# Altium PCB SOIC28.PcbDoc
Units mil, origin at the board's own origin, x right, y up, seen from the top; angles counter-clockwise.
Board outline 800 x 1400 mil, 2 copper layers (Top Layer, Bottom Layer); 3 components, 28 nets, 56 pads, 0 vias.
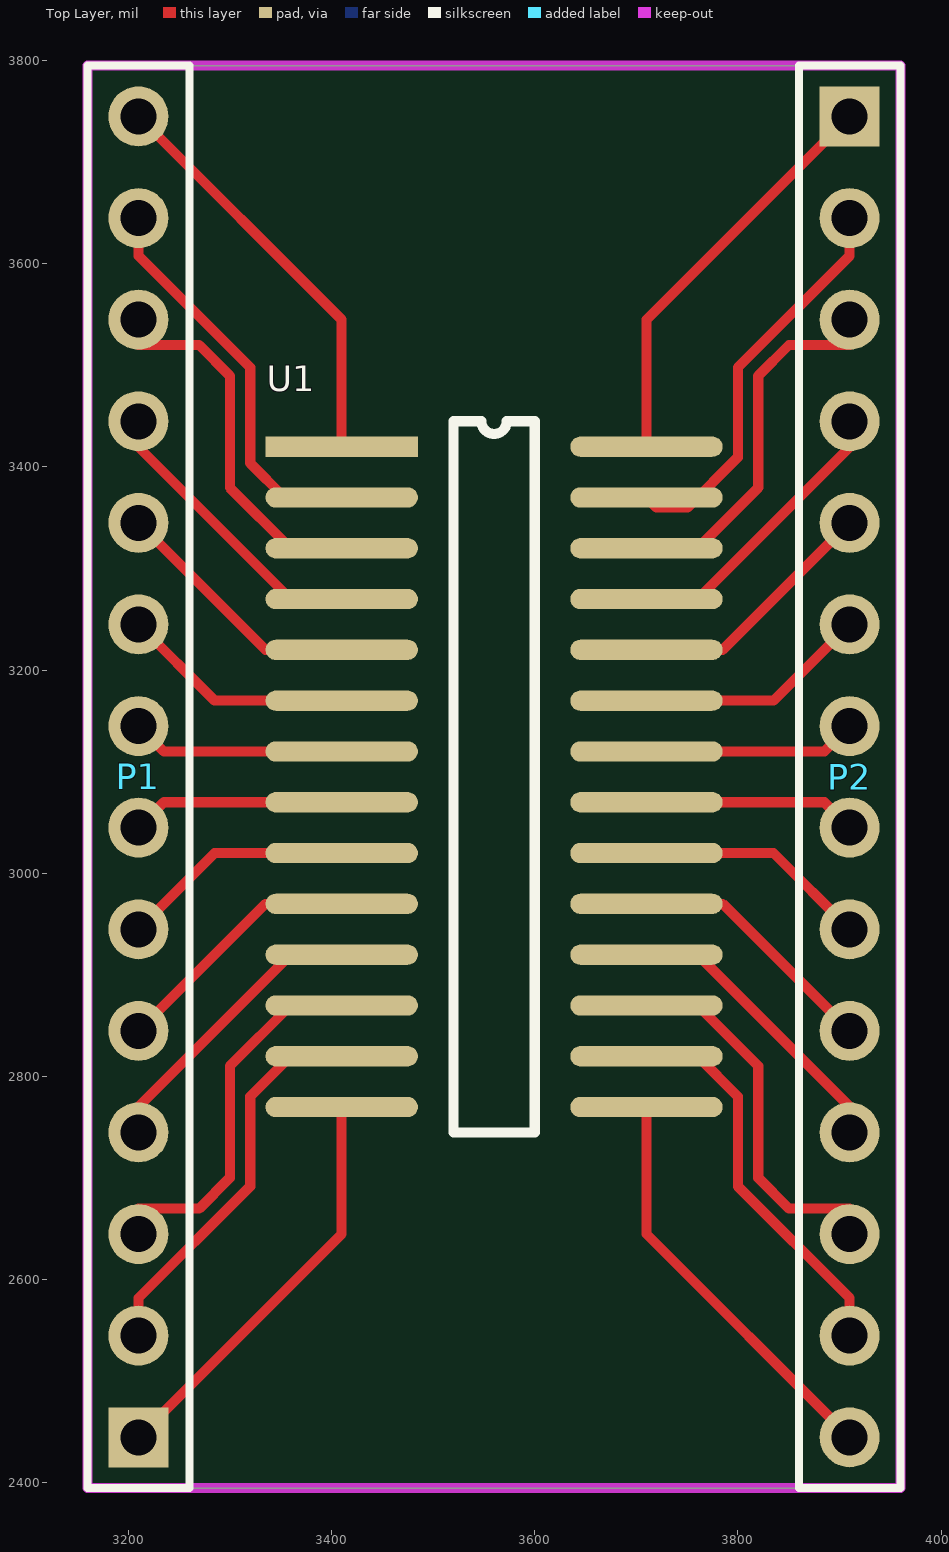
[diagram p0: Top Layer view]
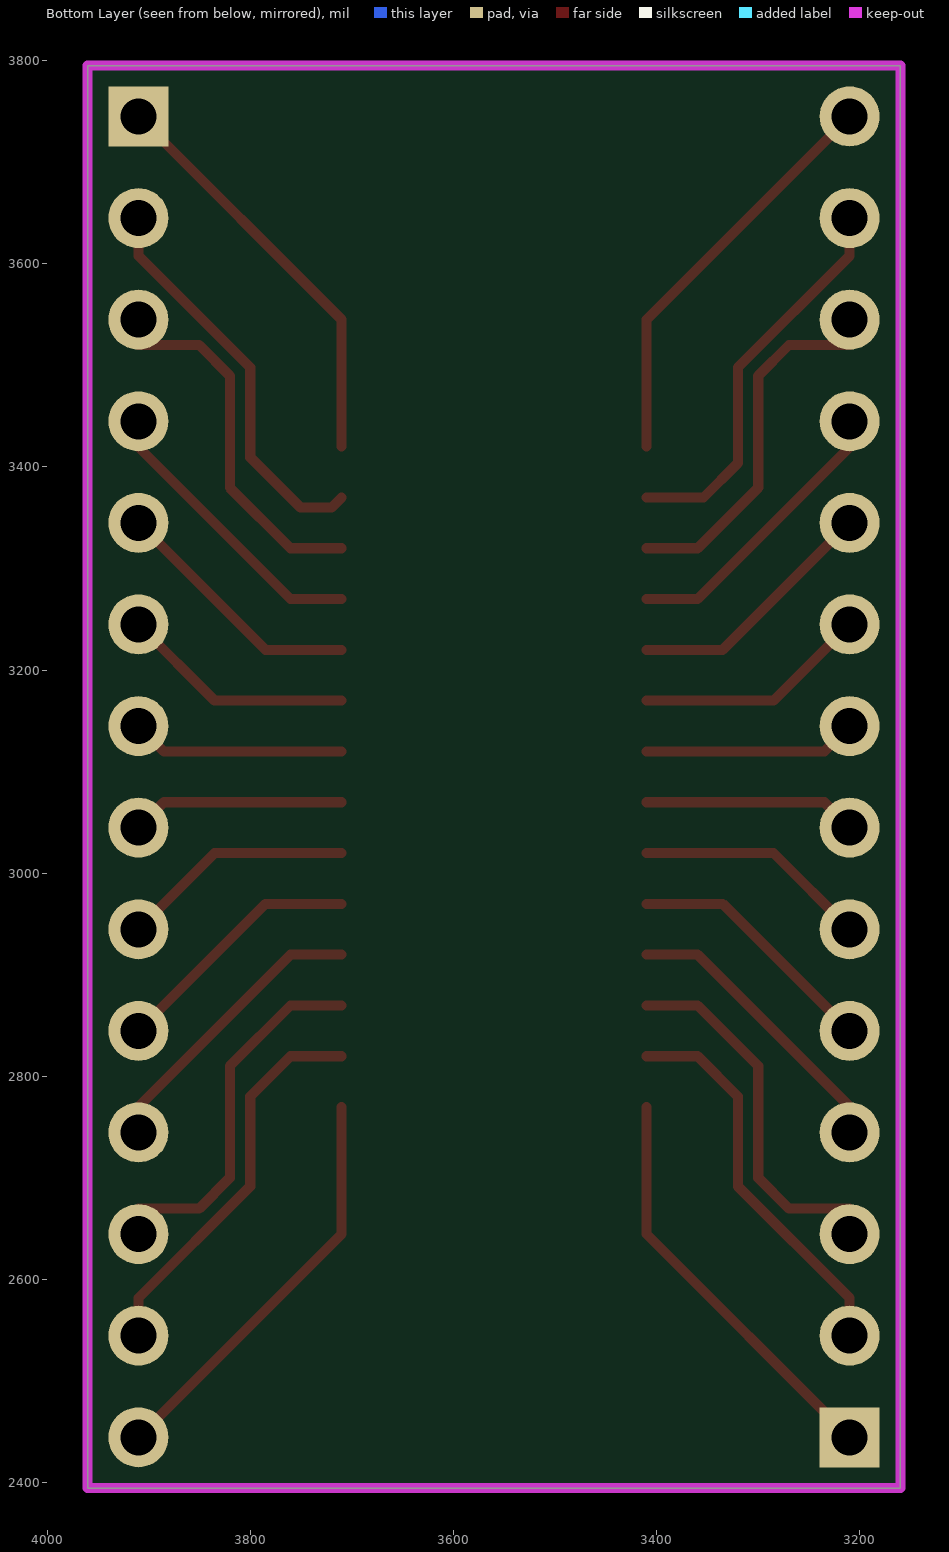
[diagram p1: Bottom Layer view, seen from below]

## Layer stack, top to bottom
Top Solder: solder mask 0.4, Solder Resist, Dk 3.5
Top Layer: signal copper 1.4
Dielectric 1: dielectric 12.6, FR-4, Dk 4.8
Bottom Layer: signal copper 1.4
Bottom Solder: solder mask 0.4, Solder Resist, Dk 3.5

## Board outline
3160,2395 3160,3795 3960,3795 3960,2395

## Design rules (kind name [scope] priority, off if disabled: settings)
Clearance [All] p1: gap=10 ignorepadtopadclearanceinfootprint=FALSE except(0: Arc-Hole Track-Hole SMDPad-Hole THPad-Hole Via-Hole Fill-Hole Poly-Hole Region-Hole Text-Hole)
PolygonConnect [All] p1: connectstyle=Relief reliefconductorwidth=10 reliefentries=4 polygonreliefangle="90 Angle" airgapwidth=10
RoutingVias [All] p1: holewidth=28 width=50 viastyle="Through Hole" minholewidth=28 minwidth=50 maxholewidth=28 maxwidth=50
SolderMaskExpansion [All] p1: expansion=4
Width [All] p1: maxlimit=10 minlimit=10 preferedwidth=10
30 further rules are at their usual default settings.

## Components (designator, comment, footprint, x,y, rotation, side; value= is the part's Value field where it differs from the comment)
P1 "Header 14" HDR1X14 3210,2445 r90 top
P2 "Header 14" HDR1X14 3910,3745 r270 top
U1 "SOIC_28" SOIC28 3410,3420 r0 top

## Footprints (in the part's own frame and the unit in brackets; to place one, negate y for a bottom-side part, rotate by r counter-clockwise, add the part's x,y. Pads: shape width x height; smd on the part's side, far side on the other; paste and mask are expansions set on the pad)
HDR1X14 [mm] "Connector; Header; 14 Position"
  rect 1.5x1.5 hole 0.9: 1(0,0)
  round 1.5 hole 0.9: 2(2.54,0) 3(5.08,0) 4(7.62,0) 5(10.16,0) 6(12.7,0) 7(15.24,0) 8(17.78,0) 9(20.32,0) 10(22.86,0) 11(25.4,0) 12(27.94,0) 13(30.48,0) 14(33.02,0)
  silkscreen extent -1.27,-1.27 34.29,1.27
SOIC28 [mil]
  rect 150x20 smd: 1(0,0)
  oval 150x20 smd: 2(0,-50) 3(0,-100) 4(0,-150) 5(0,-200) 6(0,-250) 7(0,-300) 8(0,-350) 9(0,-400) 10(0,-450) 11(0,-500) 12(0,-550) 13(0,-600) 14(0,-650) 15(300,-650) 16(300,-600) 17(300,-550) 18(300,-500) 19(300,-450) 20(300,-400) 21(300,-350) 22(300,-300) 23(300,-250) 24(300,-200) 25(300,-150) 26(300,-100) 27(300,-50) 28(300,0)
  silkscreen extent 110,-675 190,25

## Part data
P1 P2: "Header, 14-Pin", LatestRevisionDate=17-Jul-2002, LatestRevisionNote="Re-released for DXP Platform.", Publisher="Altium Limited"

## Nets (pads, with @x,y where several pads share a name; then routed paths per layer and width w, separated by ;. In a path a pad name is that pad's centre, name@x,y a point inside that pad or via, vN(x,y) a via of type N, cw(c..) or ccw(c..) an arc to the next point about the centre after c; other vN are vias at no path point)
NetP1_1: P1.1 U1.14 | length 407.8
  Top Layer w10: P1.1 3410,2645 U1.14
NetP1_2: P1.2 U1.13 | length 387.3
  Top Layer w10: P1.2 3210,2582.03 3320,2692.03 3320,2780.36 3359.64,2820 U1.13
NetP1_3: P1.3 U1.12 | length 372.3
  Top Layer w10: P1.3 3210,2670 3269.69,2670 3300,2700.31 3300,2810.36 3359.64,2870 U1.12
NetP1_4: P1.4 U1.11 | length 287.3
  Top Layer w10: P1.4 3210,2770.36 3359.64,2920 U1.11
NetP1_5: P1.5 U1.10 | length 251.8
  Top Layer w10: P1.5 3335,2970 U1.10
NetP1_6: P1.6 U1.9 | length 231.1
  Top Layer w10: P1.6 3285,3020 U1.9
NetP1_7: P1.7 U1.8 | length 210.4
  Top Layer w10: P1.7 3235,3070 U1.8
NetP1_8: P1.8 U1.7 | length 210.4
  Top Layer w10: P1.8 3235,3120 U1.7
NetP1_9: P1.9 U1.6 | length 231.1
  Top Layer w10: P1.9 3285,3170 U1.6
NetP1_10: P1.10 U1.5 | length 251.8
  Top Layer w10: P1.10 3335,3220 U1.5
NetP1_11: P1.11 U1.4 | length 287.3
  Top Layer w10: P1.11 3210,3419.64 3359.64,3270 U1.4
NetP1_12: P1.12 U1.3 | length 372.3
  Top Layer w10: P1.12 3210,3520 3269.69,3520 3300,3489.69 3300,3379.64 3359.64,3320 U1.3
NetP1_13: P1.13 U1.2 | length 390.8
  Top Layer w10: P1.13 3210,3607.97 3320,3497.97 3320,3403.79 3353.79,3370 U1.2
NetP1_14: P1.14 U1.1 | length 407.8
  Top Layer w10: P1.14 3410,3545 U1.1
NetP2_1: P2.1 U1.28 | length 407.8
  Top Layer w10: U1.28 3710,3545 P2.1
NetP2_2: P2.2 U1.27 | length 395.6
  Top Layer w10: U1.27 3720,3360 3750.36,3360 3800,3409.64 3800,3497.97 3910,3607.97 P2.2
NetP2_3: P2.3 U1.26 | length 372.3
  Top Layer w10: U1.26 3760.36,3320 3820,3379.64 3820,3489.69 3850.31,3520 3910,3520 P2.3
NetP2_4: P2.4 U1.25 | length 287.3
  Top Layer w10: U1.25 3760.36,3270 3910,3419.64 P2.4
NetP2_5: P2.5 U1.24 | length 251.8
  Top Layer w10: U1.24 3785,3220 P2.5
NetP2_6: P2.6 U1.23 | length 231.1
  Top Layer w10: U1.23 3835,3170 P2.6
NetP2_7: P2.7 U1.22 | length 210.4
  Top Layer w10: U1.22 3885,3120 P2.7
NetP2_8: P2.8 U1.21 | length 210.4
  Top Layer w10: U1.21 3885,3070 P2.8
NetP2_9: P2.9 U1.20 | length 231.1
  Top Layer w10: U1.20 3835,3020 P2.9
NetP2_10: P2.10 U1.19 | length 251.8
  Top Layer w10: U1.19 3785,2970 P2.10
NetP2_11: P2.11 U1.18 | length 287.3
  Top Layer w10: U1.18 3760.36,2920 3910,2770.36 P2.11
NetP2_12: P2.12 U1.17 | length 372.3
  Top Layer w10: U1.17 3760.36,2870 3820,2810.36 3820,2700.31 3850.31,2670 3910,2670 P2.12
NetP2_13: P2.13 U1.16 | length 387.3
  Top Layer w10: U1.16 3760.36,2820 3800,2780.36 3800,2692.03 3910,2582.03 P2.13
NetP2_14: P2.14 U1.15 | length 407.8
  Top Layer w10: U1.15 3710,2645 P2.14

## Keep-outs
Keep-Out Layer:
  the board outline again, w10